# Altium PCB NIXIE_IN-14.pcbdoc
Units mm, origin at the board's own origin, x right, y up, seen from the top; angles counter-clockwise.
Board outline 141.22 x 110.49 mm, 2 copper layers (Top Layer, Bottom Layer); 38 components, 67 nets, 242 pads, 0 vias.
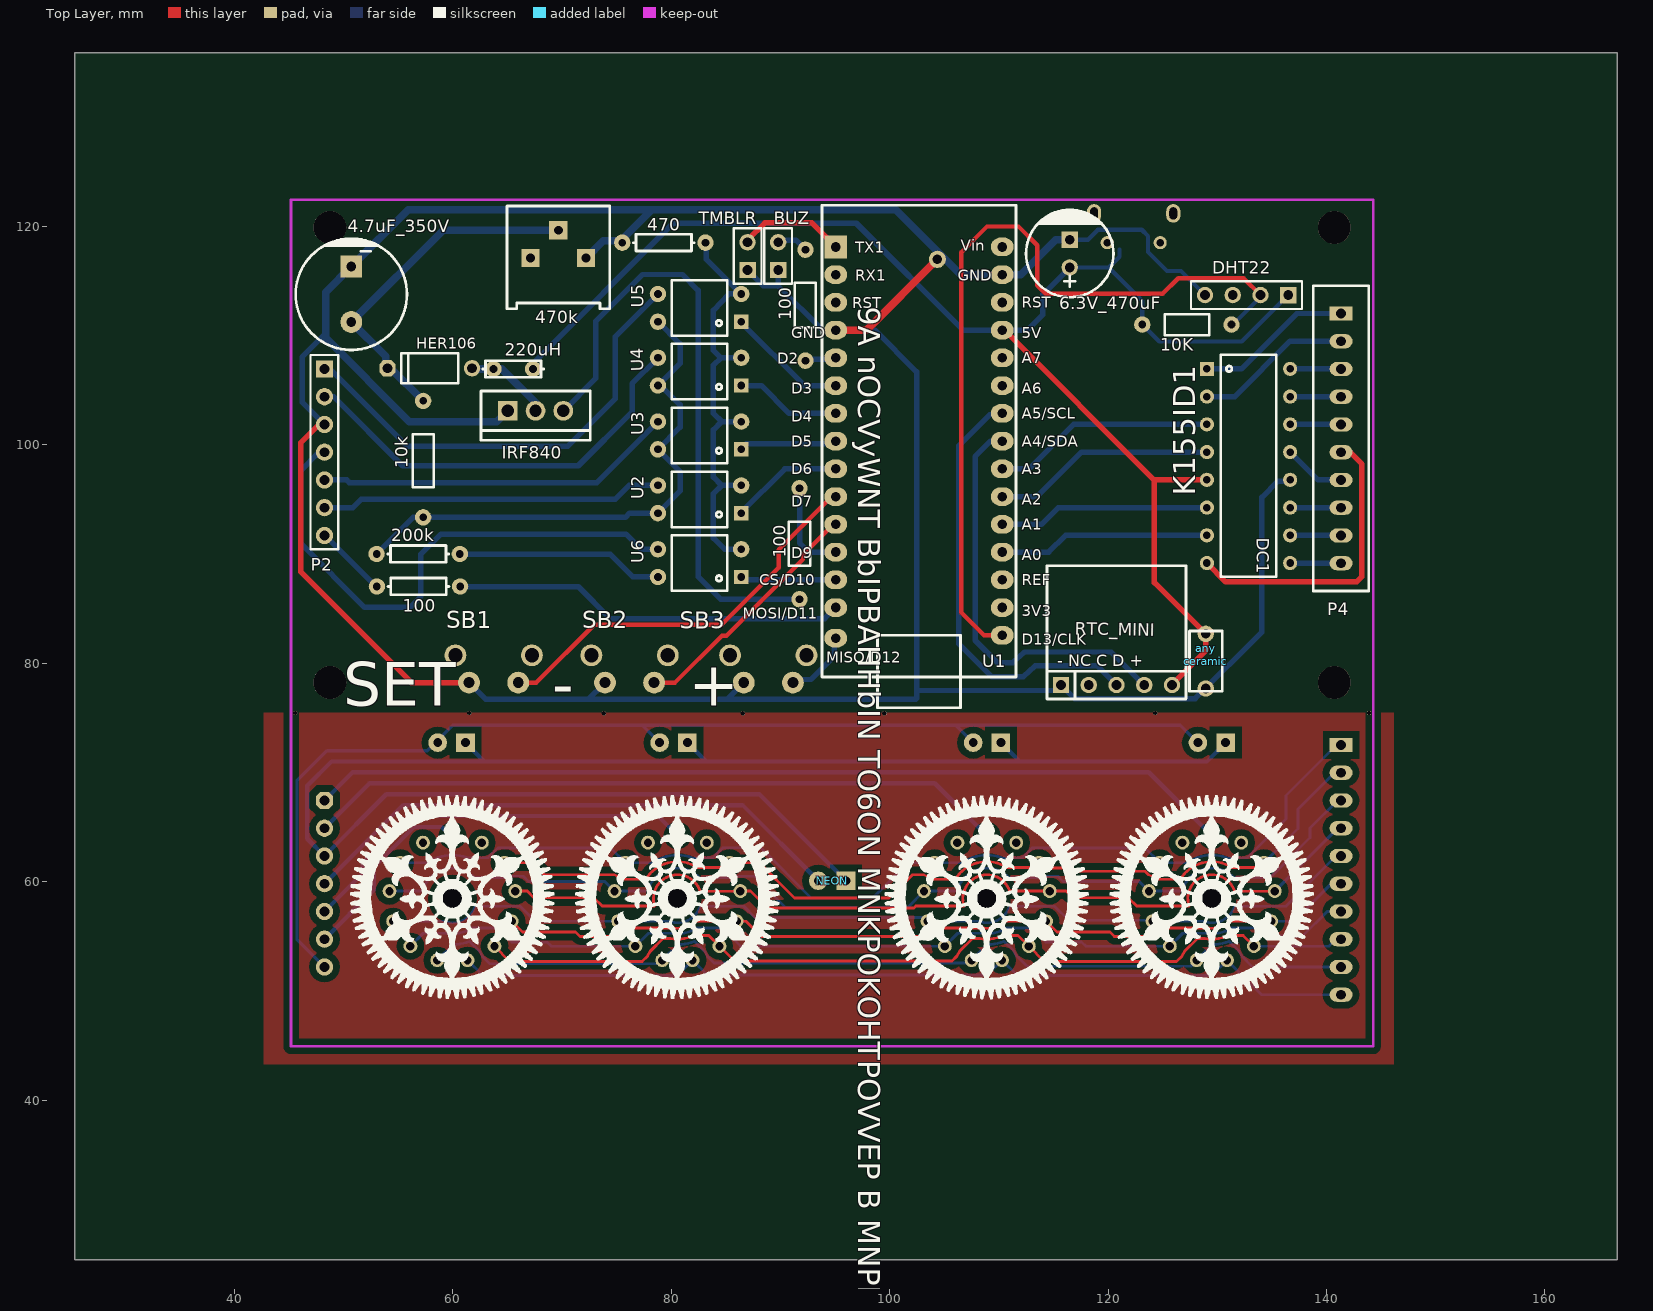
[diagram p0: Top Layer view]
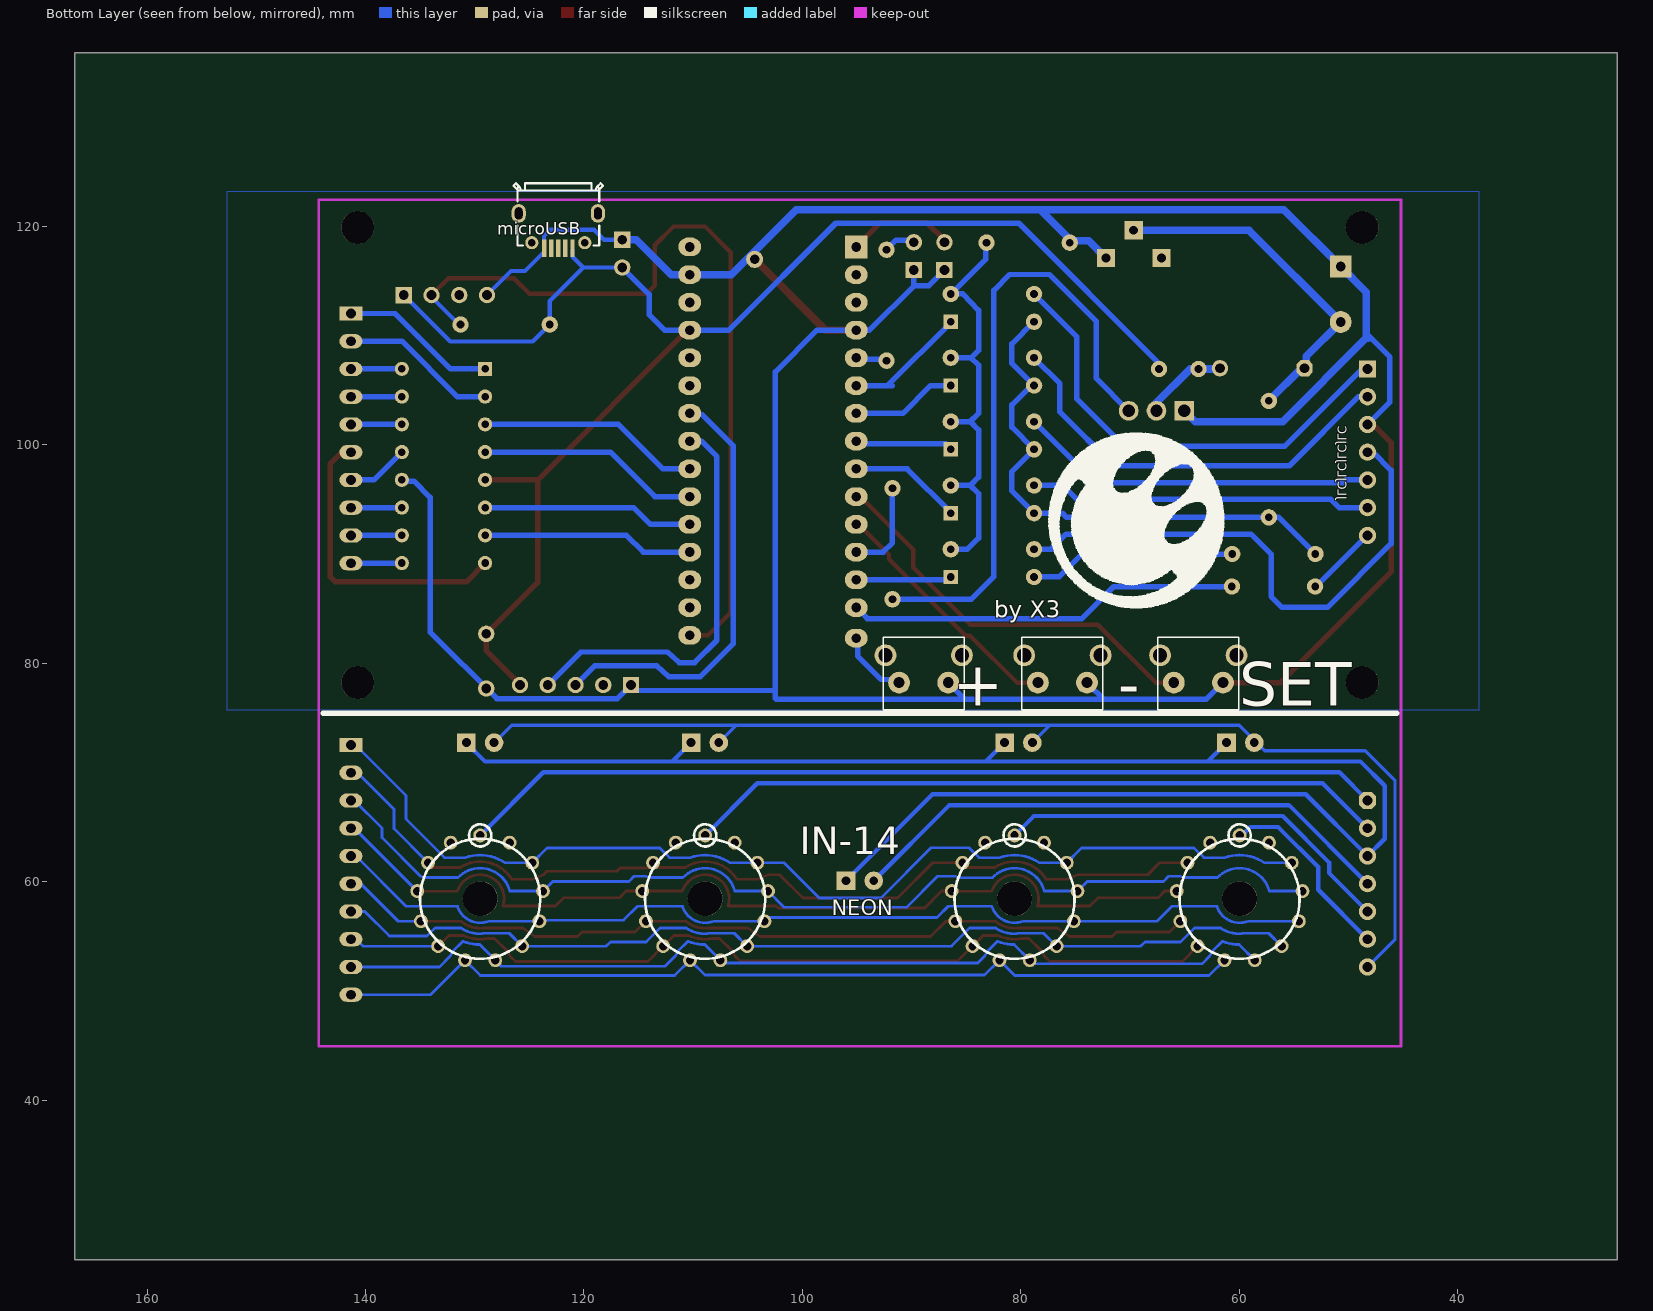
[diagram p1: Bottom Layer view, seen from below]

## Layer stack, top to bottom
Top Solder: solder mask 0.0102, Solder Resist, Dk 3.5
Top Layer: signal copper 0.0356
Dielectric1: dielectric 0.32, FR-4, Dk 4.8
Bottom Layer: signal copper 0.0356
Bottom Solder: solder mask 0.0102, Solder Resist, Dk 3.5

## Board outline
166.624,25.4 25.4,25.4 25.4,135.89 166.624,135.89

## Design rules (kind name [scope] priority, off if disabled: settings)
Clearance [All] p1: gap=0.6 ignorepadtopadclearanceinfootprint=FALSE
DiffPairsRouting [All] p1: maxlimit=0.5 minlimit=0.254 mostfreqgap=0.254 toplayer_minwidth=0.254 toplayer_maxwidth=0.381 toplayer_prefwidth=0.381 bottomlayer_minwidth=0.254 bottomlayer_maxwidth=0.381 bottomlayer_prefwidth=0.381 maxuncoupledlength=12.7
HoleSize [All] p1: absolutevalues=TRUE maxlimit=4.54 minlimit=0.025 maxpercent=80.000 minpercent=20.000
PolygonConnect [All] p1: connectstyle=Relief reliefconductorwidth=0.254 reliefentries=4 polygonreliefangle="90 Angle" airgapwidth=0.254
RoutingVias [All] p1: holewidth=0.711 width=1.27 viastyle="Through Hole" minholewidth=0.711 minwidth=1.27 maxholewidth=0.711 maxwidth=1.27
SilkToSilkClearance [All] p1: silktosilkclearance=0
SolderMaskExpansion [All] p1: expansion=0.102
UnRoutedNet [All] p1: checkbadconnections=TRUE
Width [All] p1: maxlimit=1 minlimit=0.254 preferedwidth=0.4
26 further rules are at their usual default settings.

## Components (designator, comment, footprint, x,y, rotation, side; value= is the part's Value field where it differs from the comment)
4.7uF_350V "4.7u 350В" CP_10X13MM 50.725,113.775 r0 top
6.3V_470uF "CAP-D6.3XF2.5" CAP-D6.3XF2.5 116.5,117.5 r90 top
10k "10k" RC06#1 57.3,93.85 r90 top
10K "10k" RC06#2 131.3,111 r180 top
100 "22k" RC06#3 91.758,96.012 r270 top
100 "330k" RC06#3 92.3,117.856 r270 top
100 "AXIAL-0.3" AXIAL-0.3#1 56.875,87.025 r0 top
200k "AXIAL-0.3" AXIAL-0.3#1 56.85,90 r0 top
220uH "AXIAL-0.3" AXIAL-0.3#2 67.548,106.934 r0 top
470 "AXIAL-0.3" AXIAL-0.3#1 79.335,118.5 r0 top
470k "_" 3386K 69.676,117.094 r0 top
"any / ceramic" "CAP-HV-5.0*3.0" CAP-HV-5.0*3.0 128.95,80.225 r90 top (schematic designator any)
BUZ "Buzzer" HDR1X2 89.8,116 r90 top
DC1 "К155ИД1" DIP16_mod 129.05,106.945 r270 top (schematic designator DС1)
DHT22 "Comment" HDR1X4 136.5,113.7 r180 top
HER106 "HER106" DO-41 61.78,107 r180 top
IRF840 "IRF840" TO-220_mod 67.818,102.854 r180 top
LED "LED" LED3MM 59.905,72.725 r0 top
LED "LED" LED3MM 80.225,72.725 r0 top
LED "LED" LED3MM 108.927,72.725 r0 top
LED "LED" LED3MM 129.501,72.725 r0 top
microUSB "MICRO-USB-B_5P-FEMALE_A01SB" MICRO-USB-B_5P-FEMALE_A01SB 122.35,120.25 r180 bottom (schematic designator CN1)
NEON "LED" LED3MM 94.742,60.081 r0 top
P1 "HDR-7X1/2.54" HDR-7X1/2.54#1 48.268,59.811 r0 top
P2 "HDR-7X1/2.54" HDR-7X1/2.54#2 48.268,99.314 r0 top
P3 "10PIN" B10B_mod 141.332,62.351 r90 top
P4 "10PIN" B10B_mod 141.332,101.854 r90 top
RTC_MINI "HEADER_PRG_1X05" HEADER_PRG_1X05 120.775,78 r0 top
SB1 "TS06V" TS-06V 63.754,81.47 r0 top
SB2 "TS06V" TS-06V 76.2,81.47 r0 top (schematic designator SB1)
SB3 "TS06V" TS-06V 88.9,81.47 r0 top (schematic designator SB1)
TMBLR "Alarm tumbler" HDR1X2 87,116 r90 top
U1 "ARDUINO-NANO-V3.0" "ARDUINO_NANO V3" 102.696,100.33 r0 top
U2 "TLP627" DIP4_mod 86.415,93.736 r90 top
U3 "TLP627" DIP4_mod 86.415,99.578 r90 top
U4 "TLP627" DIP4_mod 86.415,105.42 r90 top
U5 "TLP627" DIP4_mod 86.415,111.262 r90 top
U6 "TLP627" DIP4_mod 86.415,87.894 r90 top

## Footprints (in the part's own frame and the unit in brackets; to place one, negate y for a bottom-side part, rotate by r counter-clockwise, add the part's x,y. Pads: shape width x height; smd on the part's side, far side on the other; paste and mask are expansions set on the pad)
3386K [mil]
  rect 66x66 hole 32: 1(-100.01,0.01) 2(-0.01,100.01) 3(99.99,0.01)
  silkscreen extent -185,-183 185,187
"ARDUINO_NANO V3" [mm]
  rect 2.1x2.1 hole 0.889: 1(-7.62,17.78)
  oval 2.1x1.7 hole 0.889: 2(-7.62,15.24) 3(-7.62,12.7) 4(-7.62,10.16) 5(-7.62,7.62) 6(-7.62,5.08) 7(-7.62,2.54) 8(-7.62,0) 9(-7.62,-2.54) 10(-7.62,-5.08) 11(-7.62,-7.62) 12(-7.62,-10.16) 13(-7.62,-12.7) 14(-7.62,-15.24) 15(-7.62,-18.034) 16(7.62,-17.78) 17(7.62,-15.24) 18(7.62,-12.7) 19(7.62,-10.16) 20(7.62,-7.62) 21(7.62,-5.08) 22(7.62,-2.54) 23(7.62,0) 24(7.62,2.54) 25(7.62,5.08) 26(7.62,7.62) 27(7.62,10.16) 28(7.62,12.7) 29(7.62,15.24) 30(7.62,17.78)
  silkscreen extent -8.89,-24.4 8.89,21.59
AXIAL-0.3#1 [mm]
  round 1.5 hole 0.7: 1(-3.81,0) 2(3.81,0)
  silkscreen extent -2.79,-0.76 2.79,0.76
AXIAL-0.3#2 [mm]
  round 1.5 hole 0.7: 1(-3.81,0) 2(-0.19,0)
  silkscreen extent -4.79,-0.76 0.79,0.76
B10B_mod [mm]
  rect 1.3x2.1 hole 0.889: 1(10.16,0)
  oval 1.3x2.1 hole 0.889: 2(7.62,0) 3(5.08,0) 4(2.54,0) 5(0,0) 6(-2.54,0) 7(-5.08,0) 8(-7.62,0) 9(-10.16,0) 10(-12.7,0)
CAP-D6.3XF2.5 [mm]
  round 1.5 hole 0.889: 1(-1.27,0)
  rect 1.5x1.5 hole 0.889: 2(1.27,0)
  silkscreen extent -4,-4 4,4
CAP-HV-5.0*3.0 [mm]
  round 1.5 hole 0.889: 1(-2.54,0) 2(2.459,0)
  silkscreen extent -2.79,-1.5 2.72,1.5
CP_10X13MM [mm]
  round 2 hole 0.889: 1(0,-2.54)
  rect 2x2 hole 0.889: 2(0,2.54)
  silkscreen extent -5.1,-5.09 5.1,5.09
DIP4_mod [mm]
  rect 1.3x1.3 hole 0.701: 1(0,0)
  round 1.5 hole 0.7: 2(2.54,0) 3(2.54,7.62) 4(0,7.62)
  silkscreen extent -1.27,1.27 3.81,6.35
DIP16_mod [mm]
  rect 1.3x1.3 hole 0.701: 1(0,0)
  round 1.3 hole 0.701: 2(2.54,0) 3(5.08,0) 4(7.62,0) 5(10.16,0) 6(12.7,0) 7(15.24,0) 8(17.78,0) 9(17.78,7.62) 10(15.24,7.62) 11(12.7,7.62) 12(10.16,7.62) 13(7.62,7.62) 14(5.08,7.62) 15(2.54,7.62) 16(0,7.62)
  silkscreen extent -1.27,1.27 19.05,6.35
DO-41 [mm]
  round 1.5 hole 0.889: 1(0,0)
  oct 1.5x1.5 hole 0.889: 2(7.747,0)
  silkscreen extent 1.27,-1.37 6.48,1.37
HDR1X2 [mm] "Connector; Header; 2 Position"
  rect 1.5x1.5 hole 0.889: 1(0,0)
  round 1.5 hole 0.889: 2(2.54,0)
  silkscreen extent -1.27,-1.27 3.81,1.27
HDR1X4 [mm] "Connector; Header; 4 Position"
  rect 1.5x1.5 hole 0.889: 1(0,0)
  round 1.5 hole 0.889: 2(2.54,0) 3(5.08,0) 4(7.62,0)
  silkscreen extent -1.27,-1.27 8.89,1.27
HDR-7X1/2.54#1 [mil]
  oct 62x62 hole 35: 1(-0.01,300)
  round 62 hole 35: 2(-0.01,200) 3(-0.01,100) 4(-0.01,0) 5(-0.01,-100) 6(-0.01,-200) 7(-0.01,-300)
HDR-7X1/2.54#2 [mil]
  rect 62x62 hole 35: 1(-0.01,300)
  round 62 hole 35: 2(0,200) 3(0,100) 4(0,0) 5(0,-100) 6(0,-200) 7(0,-300)
  silkscreen extent -50,-350 50,350
HEADER_PRG_1X05 [mm]
  rect 1.5x1.5 hole 0.889: 1(-5.08,0)
  round 1.5 hole 0.889: 2(-2.54,0) 3(0,0) 4(2.54,0) 5(5.08,0)
  silkscreen extent -6.35,-1.27 6.35,1.27
LED3MM [mm]
  round 1.7 hole 0.813: A(-1.27,0)
  rect 1.7x1.7 hole 0.813: K(1.27,0)
MICRO-USB-B_5P-FEMALE_A01SB [mm]
  rect 0.4x1.6 smd: 1(1.3,-2.275) 2(0.65,-2.275) 3(0,-2.275) 4(-0.65,-2.275) 5(-1.3,-2.275)
  oval 1.3x1.7 hole 0.7 slot 1.1 at 90 deg: SH1(-3.625,0.925) SH2(3.625,0.925)
  round 1.2 hole 0.7: SH3(-2.425,-1.755) SH4(2.425,-1.755)
  silkscreen extent -4.1,-2.01 4.1,3.69
RC06#1 [mm]
  round 1.5 hole 0.7: 1(-0.5,0) 2(10.16,0)
  silkscreen extent 2.25,-0.96 7.11,0.97
RC06#2 [mm]
  round 1.5 hole 0.7: 1(0,0) 2(8.16,0)
  silkscreen extent 2.05,-0.96 6.11,0.97
RC06#3 [mm]
  round 1.5 hole 0.7: 1(0,0) 2(10.16,0)
  silkscreen extent 3.05,-0.97 7.11,0.97
TO-220_mod [mm]
  round 1.8 hole 1.118: 1(-2.312,-0.254) 2(0.229,-0.254)
  rect 1.8x1.8 hole 1.118: 3(2.769,-0.254)
  silkscreen extent -4.78,-2.05 5.22,2.45
TS-06V [mm]
  round 2 hole 1.3: 0(-3.5,-0.75) 0(3.5,-0.75)
  round 2 hole 1: 1(2.25,-3.25) 2(-2.25,-3.25)
  body extent -3.7,-6.4 3.7,0.9, height 7

## Part data
SB1 SB2 SB3: library part "Buton TS-06V"

## Free pads (board coordinates)
  round 1.27 hole 0.762: 1(59.979,64.235) 1(80.579,64.235) 1(108.905,64.235) 1(129.505,64.235) 2(58.591,52.804) 2(79.191,52.803) 2(107.517,52.804) 2(128.117,52.804) 3(54.221,59.134) 3(74.821,59.134) 3(103.147,59.134) 3(123.747,59.134) 4(65.737,59.134) 4(86.336,59.134) 4(114.663,59.134) 4(135.263,59.134) 5(64.752,61.73) 5(85.352,61.73) 5(113.678,61.73) 5(134.278,61.73) 6(62.674,63.571) 6(83.274,63.57) 6(111.6,63.571) 6(132.2,63.571) 7(55.205,61.73) 7(75.805,61.73) 7(104.132,61.73) 7(124.731,61.73) 8(57.283,63.571) 8(77.883,63.57) 8(106.21,63.571) 8(126.809,63.571) 9(54.556,56.378) 9(75.155,56.378) 9(103.482,56.379) 9(124.082,56.378) 10(56.133,54.094) 10(76.733,54.093) 10(105.059,54.094) 10(125.659,54.094) 11(61.367,52.804) 11(81.967,52.803) 11(110.293,52.804) 11(130.893,52.804) 12(63.825,54.094) 12(84.425,54.093) 12(112.751,54.094) 12(133.351,54.094) 13(65.402,56.378) 13(86.002,56.378) 13(114.328,56.379) 13(134.928,56.378)
  round 1.575 hole 0.889: 214(104.375,116.975)
  round 0.4 hole 0.4: ""(45.593,75.438) ""(61.525,75.438) ""(73.85,75.425) ""(86.575,75.425) ""(99.525,75.425) ""(124.325,75.438) ""(143.891,75.438)
  round 3 hole 3: ""(48.768,78.232) ""(48.768,119.888) ""(140.716,78.232) ""(140.716,119.888)
  round 3.2 hole 3.2 unplated: ""(59.979,58.435) ""(80.579,58.435) ""(108.905,58.435) ""(129.505,58.435)

## Nets (pads, with @x,y where several pads share a name; then routed paths per layer and width w, separated by ;. In a path a pad name is that pad's centre, name@x,y a point inside that pad or via, vN(x,y) a via of type N, cw(c..) or ccw(c..) an arc to the next point about the centre after c; other vN are vias at no path point)
$BoardOutlineNet: 
+5V: 6.3V_470uF.1 10K.2 220uH.2 "any / ceramic.2" DC1.5 DHT22.1 microUSB.1 RTC_MINI.5 U1.27 | length 136.9
  Top Layer w0.5: U1.27 110.516,110.49 124.221,96.785 ; RTC_MINI.5 125.855,78.069 128.95,81.164 128.95,82.575 ; 129.009,82.634 128.95,82.575 ; DC1.5 124.25,96.785 124.25,87.384 128.95,82.684 128.95,82.575
  Bottom Layer w0.4: 220uH.2 220uH.2@67.358,107.458 ; 6.3V_470uF.1 120.067,116.23 ; microUSB.1@121.046,117.875 121.046,117.209 120.067,116.23 ; DHT22.1 132.25,109.45 124.69,109.45 10K.2 123.14,113.157 120.067,116.23
  Bottom Layer w0.5: 220uH.2@67.358,107.458 80.175,120.275 96.95,120.275 106.735,110.49 112.615,110.49 114.025,111.9 114.025,113.755 6.3V_470uF.1
B0: DC1.7 U1.19 | length 19.4
  Bottom Layer w0.5: U1.19 114.57,90.17 116.105,91.705 129.005,91.705 DC1.7@129.05,91.66
B1: DC1.6 U1.20 | length 19.4
  Bottom Layer w0.5: U1.20 113.91,92.71 115.445,94.245 DC1.6 DC1.6@129.05,94.2
B2: DC1.4 U1.21 | length 20.4
  Bottom Layer w0.5: U1.21 113.508,95.25 117.584,99.325 129.005,99.325 DC1.4@129.05,99.28
B3: DC1.3 U1.22 | length 20.4
  Bottom Layer w0.5: U1.22 112.781,97.79 116.857,101.865 DC1.3
BACKL: 100.1@53.065,87.025 100.2@60.685,87.025 P2.7 U1.14 | length 42.8
  Bottom Layer w0.5: P2.7 48.332,91.694 53.001,87.025 100.1@53.065,87.025 ; 100.2@60.685,87 71.5,87 74.426,84.074 94.06,84.074 U1.14
BACKL2: LED.A P1.7 | length 110
  Bottom Layer w0.3: P1.7 45.743,54.716 45.743,69.229 48.495,71.98 ; 48.495,71.975 57.664,71.975 60.014,74.325 ; LED.A@58.635,72.725 58.635,72.946 60.014,74.325 ; LED.A@78.955,72.725 77.355,74.325 ; LED.A@107.657,72.725 106.057,74.325 ; LED.A@128.231,72.725 126.631,74.325 106.057,74.325 ; 60.014,74.325 77.355,74.325 ; 77.355,74.325 106.057,74.325
BUTT1: SB1.1 U1.10 | length 37.1
  Top Layer w0.4: SB1.1 67.654,78.22 72.954,83.52 84.621,83.52 89.85,88.749 89.85,90.4 94.294,94.844 94.671,94.844 U1.10
BUTT2: SB2.1 U1.11 | length 22.9
  Top Layer w0.4: SB2.1 80.354,78.22 84.654,82.52 85.07,82.52 92.075,89.525 92.075,89.925 94.86,92.71 U1.11
BUTT3: SB3.1 U1.15 | length 6.5
  Bottom Layer w0.5: SB3.1 91.437,78.507 92.803,78.507 94.953,80.657 94.953,82.172 U1.15
BUZZERPIN: 100.1@92.3,117.855 BUZ.2 | length 2.9
  Bottom Layer w0.5: BUZ.2@89.8,118.725 91.43,118.725 100.1@92.3,117.855
ClockDig1: P2.6 U2.3 | length 31.4
  Bottom Layer w0.5: P2.6 50.859,94.234 51.625,95 74.325,95 74.875,95 76.151,96.276 U2.3
ClockDig2: P2.5 U3.3 | length 33.3
  Bottom Layer w0.5: P2.5 50.301,96.774 50.55,96.525 73.203,96.525 U3.3 ; U3.3@78.54,102.374 U3.3@78.783,102.617
ClockDig3: P2.2 U4.3 | length 38.8
  Bottom Layer w0.5: P2.2 49.106,104.394 55.425,98.075 71.5,98.075 76.425,103 76.425,105.589 U4.3
ClockDig4: P2.1 U5.3 | length 42.5
  Bottom Layer w0.5: P2.1 48.768,106.934 55.827,99.875 70.55,99.875 74.875,104.2 74.875,109.882 U5.3
ClockDigDot: P2.4 U6.3 | length 50.7
  Bottom Layer w0.5: 46.1,97.146 46.1,96.753 ; P2.4 47.768,99.314 46.1,97.646 46.1,97.235 46.1,96.753 ; U6.3 77.241,90.434 75.85,91.825 58.95,91.825 57.1,89.975 57.1,86.125 56.075,85.1 51.95,85.1 46.1,90.95 46.1,96.675 46.1,96.753
DC1_1: DC1.1 P4.1 | length 14.4
  Bottom Layer w0.5: DC1.1 132.22,106.945 137.289,112.014 P4.1
DC1_2: DC1.2 P4.2 | length 14.4
  Bottom Layer w0.5: DC1.2 131.605,104.405 136.674,109.474 P4.2
DC1_8: DC1.8 P4.6 | length 27.7
  Top Layer w0.5: DC1.8 130.765,87.45 142.75,87.45 143.232,87.932 143.232,98.214 142.132,99.314 P4.6
DC1_9: DC1.9 P4.10 | length 4.7
  Bottom Layer w0.5: DC1.9@136.67,89.154 P4.10@141.332,89.154
DC1_10: DC1.10 P4.9 | length 4.7
  Bottom Layer w0.5: DC1.10@136.67,91.694 P4.9@141.332,91.694
DC1_11: DC1.11 P4.8 | length 4.7
  Bottom Layer w0.5: DC1.11@136.67,94.234 P4.8@141.332,94.234
DC1_13: DC1.13 P4.7 | length 5.7
  Bottom Layer w0.5: DC1.13 139.221,96.774 P4.7
DC1_14: DC1.14 P4.5 | length 4.3
  Bottom Layer w0.5: DC1.14@137,101.854 P4.5
DC1_15: DC1.15 P4.4 | length 4.6
  Bottom Layer w0.5: DC1.15@136.775,104.394 P4.4
DC1_16: DC1.16 P4.3 | length 4.7
  Bottom Layer w0.5: DC1.16@136.67,106.934 P4.3
DHT22DATA: 10K.1 DHT22.2 U1.2 U1.16 | length 76.2
  Top Layer w0.4: U1.2 U1.2@95.233,115.726 ; U1.16 108.65,82.55 106.575,84.625 106.575,117.625 108.925,119.975 111.8,119.975 113.516,118.259 113.516,114.584 114.275,113.825 124.998,113.825 126.423,115.25 132.41,115.25 DHT22.2
  Bottom Layer w0.4: 10K.1@131.3,110.7 131.3,110.87 133.96,113.53 DHT22.2
DISP2_3: P3.10 pad.11 | length 84.7
  Bottom Layer w0.254: pad.11@61.367,52.804 62.771,51.4 80.563,51.4 81.967,52.803 83.328,51.442 108.931,51.442 110.293,52.804 111.697,51.4 129.489,51.4 130.893,52.804 134.045,49.651 P3.10
DISP2_4: P3.9 pad.2 | length 89.7
  Bottom Layer w0.254: pad.2@58.519,52.732 58.591,52.804 60.019,54.232 ; 60.016,54.235 ccw(c59.979,58.435) 61.552,54.541 ; 61.554,54.542 62.463,53.634 62.729,53.175 63.429,52.475 78.862,52.475 79.191,52.803 80.619,54.232 ; 80.615,54.235 ccw(c80.579,58.435) 82.152,54.541 ; 82.154,54.542 83.063,53.633 83.329,53.175 83.953,52.55 107.263,52.55 107.517,52.804 108.945,54.232 ; 108.942,54.235 ccw(c108.905,58.435) 110.479,54.541 ; 110.48,54.543 111.389,53.634 111.655,53.175 112.576,52.254 127.575,52.254 128.117,52.796 128.117,52.804 129.545,54.232 ; 129.542,54.235 ccw(c129.505,58.435) 131.078,54.541 ; 131.08,54.542 131.989,53.634 132.255,53.175 133.239,52.191 P3.9
DISP2_5: P3.8 pad.12 | length 83.7
  Top Layer w0.254: pad.12@63.825,54.094 65.219,52.7 77.354,52.7 77.829,53.175 78.095,53.633 79.255,54.794 79.934,54.794 79.936,54.791 ccw(c80.579,58.435) 82.125,55.073 ; 82.125,55.075 83.443,55.075 84.425,54.093 85.793,52.725 105.705,52.725 106.155,53.175 106.421,53.634 107.581,54.794 108.26,54.794 ; 108.263,54.791 ccw(c108.905,58.435) 110.451,55.074 ; 110.451,55.075 111.77,55.075 112.751,54.094 114.145,52.7 126.28,52.7 126.755,53.175 127.021,53.634 128.181,54.794 128.86,54.794 128.862,54.791 ccw(c129.505,58.435) 131.051,55.074 ; 131.051,55.075 132.369,55.075 pad.12@133.351,54.094
  Bottom Layer w0.254: pad.12@133.351,54.094 140.245,54.094 140.882,54.731 P3.8
DISP2_9: P3.4 pad.4 | length 87.9
  Top Layer w0.254: pad.4@65.737,59.134 66.835,59.134 67.45,58.519 72.955,58.519 73.702,57.772 78.481,57.772 ; 78.481,57.773 cw(c80.579,58.435) 82.669,59.12 ; 82.671,59.121 pad.4@86.336,59.121 ; pad.4@86.336,59.134 87.266,59.134 88.8,57.6 102.233,57.6 102.405,57.772 106.807,57.772 ; 106.807,57.774 cw(c108.905,58.435) 110.992,59.133 114.663,59.134 116.16,59.134 116.775,58.519 121.881,58.519 122.628,57.772 127.407,57.772 ; 127.407,57.774 cw(c129.505,58.435) 131.596,59.12 ; 131.597,59.121 pad.4@135.263,59.121
  Bottom Layer w0.254: pad.4@135.263,59.121 141.032,64.891 P3.4
DISP2_10: P3.3 pad.3 | length 98.4
  Bottom Layer w0.254: pad.3@54.221,59.134 57.268,59.134 ; 57.268,59.136 cw(c59.979,58.435) 61.999,60.374 ; 61.999,60.368 65.044,60.368 65.445,60.496 66.477,60.496 66.949,60.025 73.93,60.025 74.821,59.134 77.868,59.134 ; 77.868,59.135 cw(c80.579,58.435) 82.599,60.373 ; 82.599,60.368 85.644,60.368 86.044,60.496 87.629,60.496 90.475,57.65 101.663,57.65 103.147,59.134 106.194,59.134 ; 106.194,59.136 cw(c108.905,58.435) 110.926,60.374 ; 110.926,60.368 113.97,60.368 114.371,60.496 115.404,60.496 115.875,60.025 122.856,60.025 123.747,59.134 126.794,59.134 ; 126.794,59.136 cw(c129.505,58.435) 131.525,60.374 ; 131.525,60.368 134.57,60.368 134.971,60.496 138.5,64.025 138.5,64.9 141.031,67.431 P3.3
DISP2_11: P3.2 pad.5 | length 86.8
  Top Layer w0.254: pad.5@64.752,61.73 67.294,61.73 68.389,60.635 74.782,60.635 75.699,60.25 75.774,60.225 77.69,60.225 ; 77.69,60.228 cw(c80.579,58.435) 82.386,61.315 ; 82.386,61.306 84.929,61.306 85.352,61.73 88.07,61.73 91.296,58.504 99.96,58.504 102.092,60.635 103.108,60.635 104.025,60.25 ; 104.1,60.225 106.017,60.225 ; 106.017,60.229 cw(c108.905,58.435) 110.712,61.315 ; 110.712,61.307 113.255,61.307 113.678,61.73 113.688,61.73 114.168,61.25 116.7,61.25 117,60.95 123.393,60.95 123.708,60.635 124.625,60.25 124.7,60.225 126.616,60.225 ; 126.616,60.228 cw(c129.505,58.435) 131.312,61.315 ; 131.312,61.307 133.855,61.307 pad.5@134.278,61.73
  Bottom Layer w0.254: pad.5@134.278,61.73 137.4,64.852 137.4,66.625 140.746,69.971 P3.2
GND: 4.7uF_350V.2 6.3V_470uF.2 470.1 470k.3 "any / ceramic.1" BUZ.1 DC1.12 DHT22.4 IRF840.3 microUSB.5 P2.3 pad.214 RTC_MINI.1 SB1.2 SB2.2 SB3.2 TMBLR.1 U1.4 U1.29 | length 327.1
  Top Layer w0.5: P2.3 47.768,101.854 46.075,100.161 46.075,88.375 56.23,78.22 SB1.2
  Top Layer w0.7: U1.4 97.89,110.49 pad.214
  Bottom Layer w0.4: 6.3V_470uF.2 118.17,118.77 119.075,119.675 123.079,119.675 123.654,119.1 123.654,117.646 125.395,115.905 126.675,115.905 DHT22.4
  Bottom Layer w0.5: P2.3 46.23,103.892 46.23,108.03 48.375,110.175 ; SB1.2 63.008,76.716 72.446,76.716 ; SB2.2@73.95,78.071 73.801,78.071 72.446,76.716 ; SB3.2 85.146,76.716 ; TMBLR.1 88.45,114.55 89.8,114.55 ; BUZ.1@89.8,116.185 89.8,114.55 ; DC1.12 136.56,96.675 135.575,96.675 134.075,95.175 134.075,82.85 127.971,76.746 116.949,76.746 RTC_MINI.1 115.195,77.5 102.55,77.5 102.475,77.425 ; 72.446,76.716 85.146,76.716 ; 85.146,76.716 102.391,76.716 102.475,76.8 102.475,77.425 ; 89.8,114.55 93.86,110.49 98.66,110.49 102.475,106.675 102.475,78.05 102.475,77.425
  Bottom Layer w0.7: 48.191,109.775 48.375,109.775 ; IRF840.3 64.049,102.108 56.042,102.108 48.375,109.775 ; 470k.3 73.794,118.672 75.372,118.672 78.225,121.525 ; 6.3V_470uF.2 115.22,118.77 112.02,115.57 106.505,115.57 100.55,121.525 78.225,121.525 ; 48.375,109.775 48.375,110.175 48.375,113.966 4.7uF_350V.2 55.934,121.525 78.225,121.525
GND2: LED.K NEON.K P1.3 | length 153.7
  Bottom Layer w0.4: 46.68,68.78 46.68,63.938 P1.3 53.923,68.006 88.087,68.006 NEON.K ; 46.693,68.78 48.918,71.006 62.894,71.006 ; LED.K@61.175,72.725 62.894,71.006 ; LED.K@61.179,73.3 LED.K@61.45,73.3 ; LED.K@81.495,72.725 83.214,71.006 ; LED.K@110.197,72.725 111.916,71.006 ; LED.K@130.771,72.725 129.052,71.006 111.916,71.006 ; 62.894,71.006 83.214,71.006 ; 83.214,71.006 111.916,71.006
JP2_1: 
JP2_2: 
JP2_3: 
JP2_4: 
JP2_5: 
JP7_1: P1.6 pad.1@59.979,64.235 | length 17.5
  Bottom Layer w0.4: P1.6 52.786,59.249 52.786,61.34 56.452,65.006 59.003,65.006 59.774,64.235 pad.1@59.979,64.235
JP7_2: P1.5 pad.1@80.579,64.235 | length 37.2
  Bottom Layer w0.4: P1.5 51.786,60.789 51.786,61.754 56.038,66.006 78.808,66.006 pad.1@80.579,64.235
JP7_3: P1.2 pad.1@108.905,64.235 | length 64.3
  Bottom Layer w0.4: P1.2 52.383,69.006 104.135,69.006 pad.1@108.905,64.235
JP7_4: P1.1 pad.1@129.505,64.235 | length 84.7
  Bottom Layer w0.4: P1.1 50.843,70.006 123.734,70.006 pad.1@129.505,64.235
JP7_5: NEON.A P1.4 | length 51.1
  Bottom Layer w0.4: P1.4 55.463,67.006 86.548,67.006 NEON.A
KEYB_PIN: 
NEON: 200k.2 U6.4 | length 19
  Bottom Layer w0.5: 200k.2@60.66,89.975 74.425,89.975 76.506,87.894 U6.4
optsDot: U1.13 U6.1 | length 8.8
  Bottom Layer w0.5: U6.1 86.679,87.63 U1.13
optsGND: 470.2 U2.2 U3.2 U4.2 U5.2 U6.2 | length 40.3
  Bottom Layer w0.5: 470.2 83.217,118.428 83.217,117 U5.2 85.299,113.802 83.875,112.293 83.875,108.632 84.547,107.96 ; U6.2 84.891,90.434 83.875,91.45 83.875,95.513 84.637,96.276 ; U2.2 84.637,96.276 ; U3.2 84.637,102.118 ; U4.2 84.547,107.96 ; 84.547,107.96 83.875,107.288 83.875,102.88 84.637,102.118 ; 84.637,102.118 83.875,101.356 83.875,97.038 84.637,96.276
optsVolt: 4.7uF_350V.1 10k.1 10k.2 200k.1 470k.2 HER106.2 U2.4 U3.4 U4.4 U5.4 | length 82.3
  Bottom Layer w0.5: 200k.1 56.39,93.35 75.825,93.35 76.211,93.736 U2.4 80.827,95.768 80.827,97.546 U3.4 80.827,101.61 80.827,103.642 U4.4@79.049,105.42 ; U5.4 80.827,109.23 80.827,107.452 U4.4
  Bottom Layer w0.7: 10k.2 54.31,107 HER106.2 53.88,107.153 53.88,108.08 4.7uF_350V.1 59.124,119.634 470k.2
PEREM: P3.7 pad.10 | length 90.8
  Bottom Layer w0.254: pad.10@56.133,54.094 57.314,55.275 59.478,55.275 ; 59.478,55.274 ccw(c59.979,58.435) 61.712,55.745 64.109,55.745 65.379,54.475 68.649,54.475 69.03,54.093 76.733,54.093 77.914,55.275 80.078,55.275 ccw(c80.579,58.435) 82.312,55.745 84.709,55.745 86.36,54.094 105.059,54.094 106.24,55.275 108.405,55.275 ; 108.405,55.275 ccw(c108.905,58.435) 110.639,55.745 113.035,55.745 114.305,54.475 117.575,54.475 117.956,54.094 125.659,54.094 126.84,55.275 129.004,55.275 ; 129.004,55.274 ccw(c129.505,58.435) 131.238,55.745 133.635,55.745 134.364,55.016 137.816,55.016 140.071,57.271 P3.7
PWMPIN: 100.1@91.758,96.012 U1.12 | length 8.7
  Bottom Layer w0.5: 100.1@91.758,96.012 91.758,91.017 92.605,90.17 U1.12
Q1_2: 220uH.1 HER106.1 IRF840.2 | length 7.7
  Bottom Layer w0.7: HER106.1@61.852,106.934 64.491,106.934 67.589,103.836 IRF840.2
R1_2: 100.2@91.758,85.852 IRF840.1 | length 57.5
  Bottom Layer w0.5: IRF840.1 73.1,106.079 73.1,111.3 77.383,115.583 81.024,115.583 82.477,114.13 82.477,87.93 84.555,85.852 100.2@91.758,85.852
RBUZ: 100.2@92.3,107.695 U1.5 | length 2.9
  Bottom Layer w0.5: 100.2@92.3,107.695 92.427,107.823 94.949,107.823 U1.5
RTC_C: RTC_MINI.3 U1.24 | length 40.1
  Bottom Layer w0.5: U1.24 110.213,102.766 109.191,102.766 106.35,99.925 106.35,81.775 109.35,78.775 112.255,78.775 113.318,79.75 119.025,79.75 RTC_MINI.3
RTC_D: RTC_MINI.4 U1.23 | length 37.9
  Bottom Layer w0.5: U1.23 109.255,100.33 107.825,98.9 107.825,82.1 109.875,80.05 111.285,80.05 112.365,81.025 120.29,81.025 RTC_MINI.4
S$19328: P3.6 pad.13 | length 80.3
  Top Layer w0.254: pad.13@65.402,56.378 66.395,55.385 71.238,55.385 71.649,54.975 75.573,54.975 76.649,55.752 80.297,55.752 ; 80.297,55.75 ccw(c80.579,58.435) 82.325,56.376 ; 82.325,56.378 86.002,56.378 86.872,56.378 88.275,54.975 103.9,54.975 104.975,55.752 108.623,55.752 ; 108.623,55.75 ccw(c108.905,58.435) 110.652,56.376 ; 110.652,56.379 114.328,56.379 115.321,55.385 120.165,55.385 120.575,54.975 124.499,54.975 125.575,55.752 129.223,55.752 ; 129.223,55.75 ccw(c129.505,58.435) 131.251,56.376 ; 131.251,56.378 pad.13@134.928,56.378 ; P3.6@140.736,59.811 P3.6
  Bottom Layer w0.254: pad.13@134.928,56.378 137.003,56.378 140.436,59.811 P3.6@140.736,59.811
S$19332: P3.5 pad.9 | length 93.2
  Bottom Layer w0.254: pad.9@54.556,56.378 59.191,56.378 ; 59.191,56.381 ccw(c59.979,58.435) 62.069,57.747 ; 62.059,57.75 66.174,57.75 67.546,56.378 75.155,56.378 79.79,56.378 ; 79.79,56.381 ccw(c80.579,58.435) 82.668,57.747 ; 82.659,57.75 86.65,57.75 87.68,56.72 103.141,56.72 103.482,56.379 108.117,56.379 ; 108.117,56.381 ccw(c108.905,58.435) 110.995,57.747 ; 110.985,57.75 115.1,57.75 116.375,56.475 123.985,56.475 124.082,56.378 128.717,56.378 ; 128.717,56.381 ccw(c129.505,58.435) 131.595,57.747 ; 131.585,57.75 136.281,57.75 140.882,62.351 P3.5
S$19354: P3.1 pad.7 | length 97.8
  Bottom Layer w0.254: pad.7@55.205,61.73 57.713,61.73 ; 57.713,61.731 cw(c59.979,58.435) 61.347,62.194 63.243,62.194 64.141,63.092 74.443,63.092 75.805,61.73 78.312,61.73 ; 78.312,61.731 cw(c80.579,58.435) 81.947,62.194 83.843,62.194 84.749,63.1 88.223,63.1 92.819,58.504 98.46,58.504 101.687,61.73 104.132,61.73 106.639,61.73 ; 106.639,61.731 cw(c108.905,58.435) 110.273,62.194 112.169,62.194 113.067,63.092 123.369,63.092 124.731,61.73 127.239,61.73 ; 127.239,61.731 cw(c129.505,58.435) 130.873,62.194 132.769,62.194 136.3,65.725 136.3,67.879 140.932,72.511 P3.1
TUMBLER: TMBLR.2 U1.1 | length 9.7
  Top Layer w0.5: TMBLR.2@87,118.725 88.575,120.3 ; 88.55,120.3 88.575,120.3 ; U1.1 92.886,120.3 88.575,120.3
U1_7: U1.6 U5.1 | length 11.5
  Bottom Layer w0.5: U5.1@86.415,111.211 92.216,105.41 ; 91.76,105.41 92.216,105.41 ; U1.6@95.076,105.41 92.216,105.41
U1_10: U1.8 U3.1 | length 9
  Bottom Layer w0.5: U3.1 86.415,99.629 86.864,100.077 94.317,100.077 94.57,100.33 U1.8
U1_11: U1.9 U2.1 | length 10.4
  Bottom Layer w0.5: U2.1 86.415,93.787 90.418,97.79 U1.9@95.076,97.79
U4_1: U1.7 U4.1 | length 9.7
  Bottom Layer w0.5: U4.1 88.255,105.42 90.805,102.87 U1.7
ZAZA: 
pads on no net: 470k.1 DHT22.3 microUSB.2 microUSB.3 microUSB.4 microUSB.SH1 microUSB.SH2 microUSB.SH3 microUSB.SH4 RTC_MINI.2 SB1.0 SB2.0 SB3.0 U1.3 U1.17 U1.18 U1.25 U1.26 U1.28 U1.30

## Polygon pours and split planes (outlines as drawn)
GND on Bottom Layer "Bottom Layer-GND" (solid, shelved, pour order 0): 38.1,123.19 38.1,75.692 152.654,75.692 152.654,123.19
no net on Top Layer "Top Layer-No Net" (solid, pour order 2): 146.15,75.475 42.725,75.475 42.725,43.3 146.15,43.3

## Keep-outs
Keep-Out Layer:
  lines w0.254: 45.212,44.925 144.272,44.925 144.272,122.428 46.228,122.428 45.212,122.428 45.212,44.925

## Silkscreen, mask and mechanical layers (free items; w line width, h text height)
Top Overlay:
  drawing of 7 lines, arcs and shapes, not listed
  text "9A nOCVyWNT BbIPBAHHbIN TO6ON MNKPOKOHTPOVVEP B MNPHbIX uEVRX" at 97.15,112.625 h2 r270
  text "K155ID1" at 127.975,95.325 h2.03 r90
  text "- NC C D +" at 115.364,79.723 h1.07
  text "SET" at 50,76.1 h4
  text "-" at 69.1,76.1 h4
  text "+" at 81.6,76.1 h4
Bottom Overlay:
  drawing of 10 lines, arcs and shapes, not listed
  text "JLCJLCJLCJLC" at 51,94.95 h0.8 r90
  text "by X3" at 82.425,84.15 h1.52
  text "SET" at 60,76.1 h4
  text "-" at 69.1,76.1 h4
  text "+" at 81.6,76.1 h4
  text "IN-14" at 100.25,62.525 h2.5
Top Solder:
  drawing of 8 lines, arcs and shapes, not listed

## Dimensions
45.212,122.428 to 144.272,122.428 on Bottom Overlay

## Text inside footprints (layer, text, board x,y; h text height)
470k: Document "3" at 72.67,120.643 h0.76 r169; Document "1" at 66.501,115.443 h0.51 r180; Document "2" at 67.771,119.253 h0.51 r180; Document "3" at 72.273,115.436 h0.51 r167
U1: Top Overlay "A3" at 112.11,97.282 h1.02; Top Overlay "D6" at 91,97.282 h1.02; Top Overlay "TX1" at 96.854,117.556 h1.02; Top Overlay "GND" at 106.252,115.016 h1.02; Top Overlay "5V" at 112.11,109.729 h1.02; Top Overlay "MISO/D12" at 94.2,80.025 h1.02; Top Overlay "Vin" at 106.515,117.764 h1.02; Top Overlay "D13/CLK" at 112.11,81.7 h1.02; Top Overlay "GND" at 91,109.736 h1.02; Top Overlay "RX1" at 96.854,115.016 h1.02; Top Overlay "RST" at 96.6,112.476 h1.02; Top Overlay "D2" at 89.725,107.4 h1.02; Top Overlay "D3" at 91,104.648 h1.02; Top Overlay "D4" at 91,102.108 h1.02; Top Overlay "D5" at 91,99.822 h1.02; Top Overlay "D7" at 91,94.325 h1.02; Top Overlay "D9" at 91,89.625 h1.02; Top Overlay "CS/D10" at 88.05,87.125 h1.02; Top Overlay "MOSI/D11" at 86.55,84.075 h1.02; Top Overlay "3V3" at 112.11,84.282 h1.02; Top Overlay "REF" at 112.11,87.122 h1.02; Top Overlay "A0" at 112.11,89.408 h1.02; Top Overlay "A1" at 112.11,92.202 h1.02; Top Overlay "A2" at 112.11,94.489 h1.02; Top Overlay "A4/SDA" at 112.11,99.825 h1.02; Top Overlay "A5/SCL" at 112.11,102.375 h1.02; Top Overlay "A6" at 112.11,104.648 h1.02; Top Overlay "A7" at 112.11,107.442 h1.02; Top Overlay "RST" at 112.11,112.522 h1.02